# Altium PCB UKU100_001.PcbDoc (part 2 of 3)
Units mm, origin at the board's own origin, x right, y up, seen from the top; angles counter-clockwise.
Board outline 319.2 x 161.95 mm, 2 copper layers (Top Layer, Bottom Layer); 250 components, 337 nets, 871 pads, 490 vias.
Unrouted connection lines stored in the file: 3.
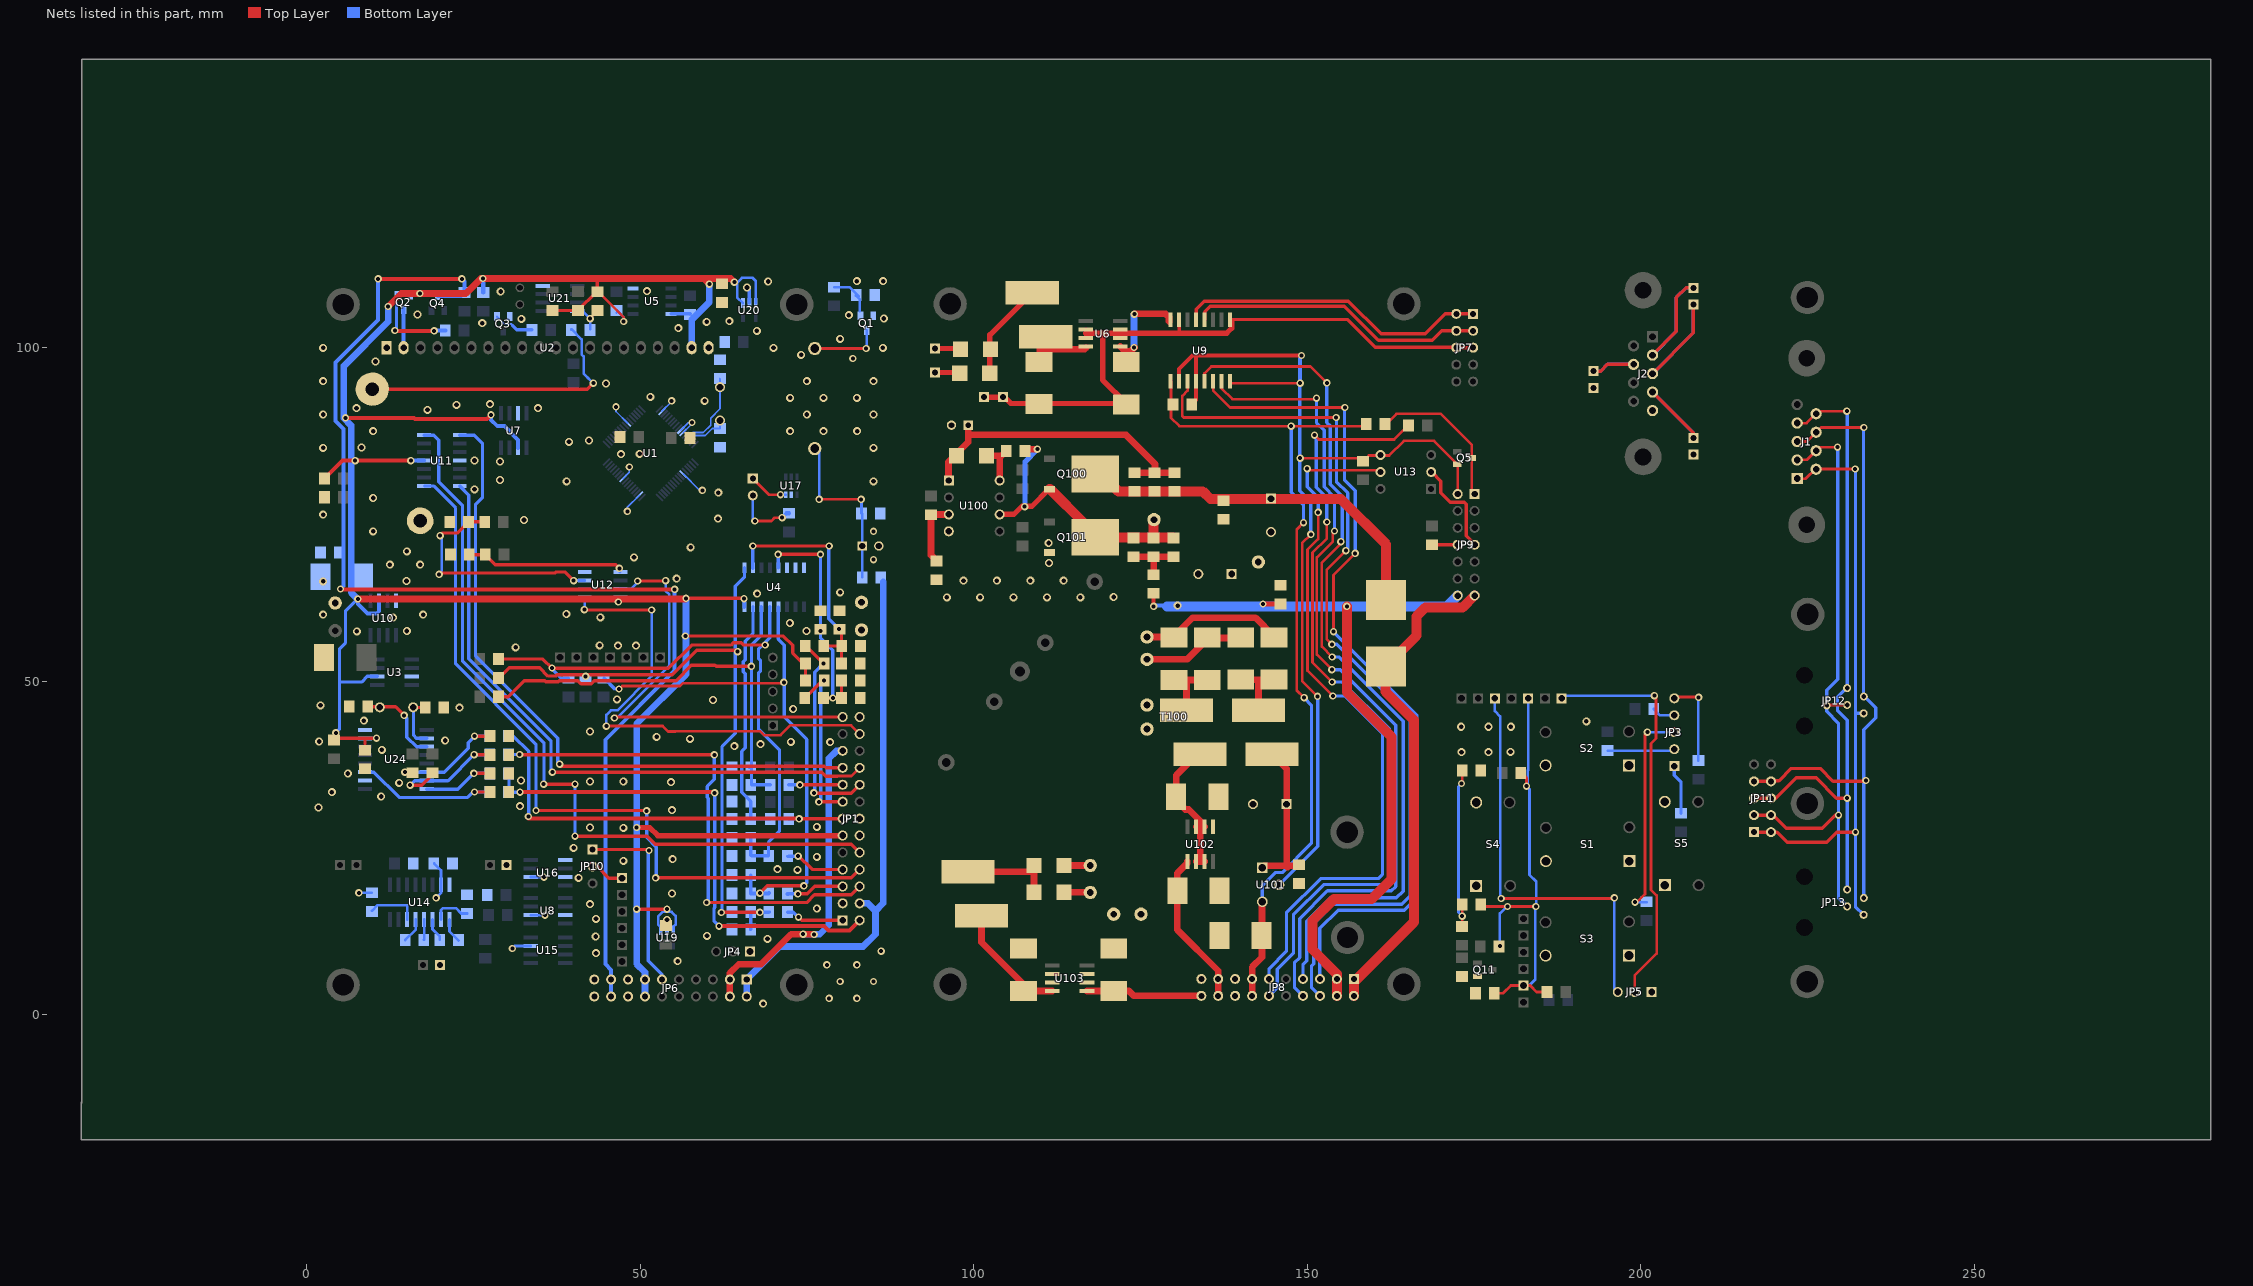
[diagram p2: the nets of this part, all layers, seen from the top]

## Via types
v1: diameter 1.1, hole 0.6, Top Layer to Bottom Layer, 338 vias
v2: diameter 1.2, hole 0.7, Top Layer to Bottom Layer, 152 vias

## Nets (pads, with @x,y where several pads share a name; then routed paths per layer and width w, separated by ;. In a path a pad name is that pad's centre, name@x,y a point inside that pad or via, vN(x,y) a via of type N, cw(c..) or ccw(c..) an arc to the next point about the centre after c; other vN are vias at no path point) (continued)
+5V: C15.2 C20.1 C54.2 D7.1 JP1.11 JP6.13 JP6.14 Q2.2 R22.2 R27.1 R63.2 R72.2 R73.1 R74.2 R75.2 R89.2 R97.2 U2.19 U3.6 U4.16 U5.8 U7.6 U10.2 U11.4 U12.8 U19.1 U19.3 U20.1 U20.3 U24.15 | length 430.8
  Top Layer w0.4: R75.2@40.7,105.6 R75.2@40.7,105.75 ; D7.1@43.35,108.4 43.75,108.4 47.55,104.6 v1(47.55,103.95)
  Top Layer w0.5: v1(4.4,42.3) 4.45,42.3 4.45,41.6 4.55,41.5 v1(10.5,41.5) ; C54.2@8.75,39.75 8.775,39.775 8.775,41.475 ; R74.2@36.9,105.6 R75.2@40.7,105.6 43.5,108.4 43.5,108.5 D7.1@43.55,108.55 ; D7.1@43.6,108.4 43.6,110.35 43.65,110.35 ; v1(49.5,15.85) v1(54.05,15.85) ; v1(56.8,56.8) 71.5,56.8 72.9,55.4 72.9,54.25 74.4,52.75 74.75,52.75 74.797,52.703 R63.2@74.797,50.097 ; v1(56.9,62.45) 65.55,62.45 v1(65.6,62.4)
  Top Layer w0.6: R27.1@2.703,80.403 5.4,83.1 v1@15.85,83.1 ; v1(5.85,89.5) 16.1,89.5 16.25,89.35 27.05,89.35 v1(27.65,89.95)
  Top Layer w0.8: v1(49.5,28.1) 51.45,28.1 52.665,26.885 JP1.11@80.38,26.885
  Top Layer w1: v1(7.7,62.35) 7.75,62.3 7.8,62.35 56.8,62.35 v1(56.9,62.45) ; v1(12.25,106.2) 14.2,108.15 23.9,108.15 26.15,110.4 56.65,110.4 ; 56.7,110.4 59.55,110.4 v1(60.4,109.55) ; 58.2,110.4 63.6,110.4 v1(64.15,109.85)
  Bottom Layer w0.3: R72.2@46.45,105.25 R72.2@46.5,105.3
  Bottom Layer w0.4: R72.2@46.6,105.55 47.55,104.6 v1(47.55,103.95) ; U19.1@53.1,12.65 53.1,13.15 52.75,13.5 52.75,14.8 53.4,15.45 54.75,15.45 55.35,14.85 55.35,13.55 55.05,13.25 U19.3@55.05,12.7 ; U19.1@53.1,12.675 U19.1@53.1,12.85 ; v1@54.05,15.45 v1(54.05,15.85) ; U20.1@65.412,106.688 64.6,107.5 64.6,109.8 65.3,110.5 66.9,110.5 67.35,110.05 U20.3@67.35,106.725
  Bottom Layer w0.5: v1(4.4,42.3) 4.95,42.85 4.95,54.85 5.85,55.75 5.85,60.55 7.675,62.375 v1@7.7,62.4 ; 4.95,49.9 8.25,49.9 9.115,50.765 U3.6@10.6,50.765 ; U24.15@8.775,41.475 v1@10.525,41.475 ; v1(10.5,41.5) v1@10.6,41.4 ; v1(46.75,61.9) 46.8,61.9 47.075,62.175 U12.8@47.075,62.595 ; U5.8@54.65,105.095 57.455,105.095 57.5,105.05 R73.1@57.55,105.1 ; U4.16@65.6,61.1 65.65,61.1 65.65,62.35 v1(65.6,62.4)
  Bottom Layer w0.6: 6.6,83.05 7.25,83.05 v1(7.3,83.1) ; v1(7.7,62.35) 7.7,61.6 9.15,60.15 10.5,60.15 10.865,60.515 U10.2@10.865,62.1 ; Q2.2@15.552,107.902 15.799,108.15 v1(17,108.15) ; v1@15.85,83.1 U11.4@17.625,83.1 ; v1(26.45,110.4) 26.5,110.35 R89.2@26.5,108.3 ; v1(27.65,89.95) 27.65,89.2 28.6,88.25 29.65,88.25 31.735,86.165 U7.6@31.735,85 ; v1@64.15,109.65 v1(64.15,109.85)
  Bottom Layer w1: v1(7.7,62.35) 7.675,62.375 6.7,63.35 6.7,88.35 5.6,89.45 5.6,97.3 12.25,103.95 v1(12.25,106.2) ; JP6.14@50.76,2.76 50.76,6.39 49.5,7.65 49.5,43.65 56.9,51.05 v1(56.9,62.45) ; U2.19@57.743,100.031 57.743,104.193 60.4,106.85 v1(60.4,109.55)
  other v1: 15.65,83.1
+5V_IZ: C27.2 C28.1 JP6.19 R47.1 R48.2 U14.16
+IAKB: 
+UOUT: JP1.4 JP6.1 JP6.2 R56.2 | length 80.8
  Bottom Layer w1: JP6.1@65.95,5.3 65.975,5.325 70.9,10.25 83.45,10.25 85.3,12.1 85.3,15.6 ; JP6.2@66,2.76 JP6.1@66,5.3 ; JP1.4@82.92,16.725 84.175,16.725 85.3,15.6 ; R56.2@86.45,64.9 86.45,16.75 85.3,15.6
-5V: C16.2 JP6.17 JP6.18 Q4.3 R90.1 | length 185.1
  Top Layer w0.6: v1(5.1,63.85) 5.15,63.8 7.5,63.8 v1(55.2,63.8) ; v1(10.75,110.35) v1(23.3,110.35)
  Bottom Layer w0.6: v1(5.1,63.85) 5.55,64.3 5.55,87.8 4.35,89 4.35,97.8 5.95,99.4 ; 5.75,99.2 10.75,104.2 v1(10.75,110.35) ; Q4.3@19.7,107.8 23.2,107.8 R90.1@23.7,108.3 23.7,109.95 v1(23.3,110.35) ; JP6.18@45.68,2.76 JP6.17@45.68,5.3 45.68,6.77 44.8,7.65 44.8,41.25 55.2,51.65 v1(55.2,63.8) ; v1(10.75,110.35) 10.7,110.4 v1(10.75,110.35)
-5V_IZ: C28.2 C30.2 JP6.20 U8.2 U14.15 U15.7 U16.2 X12.1 X14.1 | length 14.9
  Bottom Layer w0.4: v1(7.85,18.3) C30.2@9.8,18.3 ; C28.2@19.15,22.7 20.175,21.675 20.175,18.275 v1(19.45,17.55) ; v1(30.85,9.95) 31.235,10.335 U15.7@33.6,10.335 ; U8.2@33.6,14.965 35.735,14.965 v1(35.75,14.95) ; U16.2@33.6,20.665 35.585,20.665 v1(35.6,20.65)
-IAKB: 
-UOUT: JP1.21 JP6.3 JP6.4 | length 50.6
  Top Layer w0.8: JP1.21@80.38,39.585 JP1.21@80.38,39.6
  Top Layer w1: JP6.4@63.46,2.76 63.46,6.26 64.8,7.6 68.15,7.6 72.65,12.1 v1(74.45,12.1) ; v1@74.5,12.1 76.05,12.1 v1(76.1,12.05)
  Bottom Layer w1: v1(74.45,12.1) 76.95,12.1 78.3,13.45 78.3,38.45 79.435,39.585 JP1.21@80.38,39.585 ; v1@76.05,12.1 v1(76.1,12.05)
AD0: C11.2 R11.1 R32.1 U24.7 | length 20.4
  Top Layer w0.5: v1(15.55,34.45) 17.3,34.45 18.897,36.047 R32.1@18.897,36.303 ; v1(25.15,39.007) 27.493,39.007 C11.2@27.5,39
  Bottom Layer w0.5: v1(15.55,34.45) 16.225,35.125 21.225,35.125 25.107,39.007 R11.1@27.488,39.007
AD1: C24.2 R19.1 R44.1 U24.6 | length 19
  Top Layer w0.5: v1(14.75,36.4) 14.847,36.303 R44.1@15.897,36.303 ; v1(25.2,41.8) C24.2@27.45,41.8
  Bottom Layer w0.5: v1(14.75,36.4) 14.7,36.4 14.705,36.395 20.645,36.395 24.25,40 24.25,40.8 25.257,41.807 R19.1@27.488,41.807
AIN1: JP1.7 R21.2 | length 9
  Top Layer w0.5: v1(73.7,23.8) 73.8,23.8 75.795,21.805 JP1.7@80.38,21.805
  Bottom Layer w0.4: R21.2@72.1,23.8 72.142,23.758 R21.2@72.15,23.75
  Bottom Layer w0.5: R21.2@72.3,23.8 v1(73.7,23.8)
AIN1U: C9.1 R20.1 R21.1 R29.1 R33.1 U4.13 | length 90.7
  Top Layer w0.5: R29.1@28.797,53.346 35.454,53.346 36.85,51.95 54.25,51.95 57.75,55.45 63.65,55.45 64,55.8 65.2,55.8 65.55,55.45 v1(68.75,55.45)
  Bottom Layer w0.5: v1@36.85,51.85 36.85,51.8 38.203,50.447 R33.1@39.253,50.447 ; R20.1@66.6,26.45 66.6,23.95 66.7,23.85 69.25,23.85 69.25,25.85 70.9,27.5 70.9,39.75 67.75,42.9 67.75,51.2 68.05,51.5 68.05,53.15 67.75,53.45 67.75,54.8 68.575,55.625 69.465,56.515 U4.13@69.465,61.175
  other v1: 36.8,52
AIN2: JP1.13 R17.2 R19.2 | length 63
  Top Layer w0.5: v1@73.775,29.425 JP1.13@80.38,29.425
  Top Layer w0.6: v1@33.3,29.45 33.325,29.425 v1@73.8,29.425 ; v1@73.75,29.4 v1@73.775,29.425
  Bottom Layer w0.4: R17.2@72.1,29.4 R17.2@72.4,29.4
  Bottom Layer w0.5: R19.2@30.2,41.8 31,41.8 33.3,39.5 v1@33.3,29.45 ; R17.2@72.35,29.4 v1@73.75,29.4
  other v1: 73.85,29.4 33.25,29.75
AIN2U: C6.1 R16.1 R17.1 U4.15 | length 36.2
  Bottom Layer w0.5: U4.15@66.925,61.175 66.925,57.175 65.8,56.05 65.8,53.25 65.5,52.95 65.5,51.45 65.8,51.15 65.8,40.05 65.25,39.5 65.25,33.35 C6.1@66.6,32 R16.1@66.6,29.4 R17.1@69.5,29.4
AIN3: JP1.1 R7.2 | length 8.8
  Top Layer w0.5: v1(73.75,14.65) 74.215,14.185 JP1.1@80.38,14.185
  Bottom Layer w0.5: R7.2@72.1,15.4 73,15.4 v1(73.75,14.65)
AIN3U: C1.1 R6.1 R7.1 R30.1 R37.1 U4.1 | length 109.2
  Top Layer w0.5: R30.1@28.85,50.5 30.4,52.05 34.95,52.05 36.2,50.8 37.35,50.8 37.55,51 54.85,51 58.5,54.65 64.45,54.65 v1(64.65,54.45) ; v1@41.85,50.6 v1(41.85,50.75) ; v1@62.3,15.35 62.325,15.375 v1(67.95,15.375)
  Bottom Layer w0.4: R6.1@66.2,15.35 R6.1@66.55,15.35 ; C1.1@66.55,12.75 R6.1@66.55,15.35 ; R7.1@69.25,15.4 69.275,15.375 R7.1@69.3,15.35 ; R7.1@69.45,15.4 69.45,15.45 69.4,15.4 R6.1@66.6,15.4 R6.1@66.55,15.35
  Bottom Layer w0.5: v1(41.85,50.75) 41.853,50.747 R37.1@41.853,50.447 ; v1@62.3,15.35 62.3,40.25 64.3,42.25 64.3,63.4 64.3,64.25 65.655,65.605 U4.1@65.655,67.025 ; C1.1@66.6,12.8 R6.1@66.6,15.4 66.625,15.375 R7.1@69.275,15.375 ; v1@67.9,15.4 67.925,15.375 v1(67.95,15.375)
  other v1: 62.2,15.35
AIN4: JP1.17 R9.2 | length 8.1
  Top Layer w0.5: v1(73.95,34.5) 80.375,34.5 JP1.17@80.38,34.505
  Bottom Layer w0.5: R9.2@72.3,34.5 v1(73.95,34.5)
AIN4U: C2.1 R8.1 R9.1 R31.1 U4.14 | length 70.6
  Top Layer w0.5: R31.1@28.797,47.697 30.247,47.697 32.65,50.1 35.739,50.1 35.889,49.95 37.761,49.95 37.911,50.1 40.7,50.1 41.15,49.65 42.7,49.65 43.15,50.1 55.4,50.1 57.7,52.4 61.25,52.4 61.4,52.25 v1(66.7,52.25)
  Bottom Layer w0.4: C2.1@66.4,37.05 C2.1@66.55,37.05
  Bottom Layer w0.5: U4.14@68.195,61.175 68.195,56.945 66.7,55.45 66.7,37.2 66.7,34.55 66.75,34.5 R9.1@69.5,34.5
AIN5: JP1.5 R13.2 | length 8.8
  Top Layer w0.5: v1@73.6,18.15 75.05,18.15 76.165,19.265 JP1.5@80.38,19.265
  Bottom Layer w0.5: R13.2@72.15,18.2 72.15,18.15 v1(73.65,18.15)
  Bottom Layer w0.6: R13.2@72.1,18.15 R13.2@72.15,18.15
AIN5U: C3.1 R12.1 R13.1 R39.1 U4.12 | length 84.4
  Top Layer w0.4: v1@46.9,48.85 47.35,49.3 56,49.3 56.4,49.7 v1@71.4,49.7
  Top Layer w0.5: v1(46.85,48.85) v1@46.9,48.85 ; v1(67.95,18.25) 69.05,19.35 v1(74.55,19.35) ; v1@71.4,49.7 v1(71.55,49.85)
  Bottom Layer w0.5: R39.1@44.65,50.5 44.65,50.45 46.25,48.85 v1(46.85,48.85) ; C3.1@66.6,18.2 R12.1@66.6,20.95 ; U4.12@70.7,61.1 70.7,56.35 71.6,55.45 71.6,44.7 75,41.3 75,19.8 v1(74.55,19.35) ; v1(71.55,49.85) v1@71.6,49.8
  Bottom Layer w0.6: C3.1@66.6,18.2 69.25,18.2 R13.1@69.3,18.25 ; v1@67.95,18.2 v1(67.95,18.25)
AVAR: 
C0: 
DT1: JP1.15 R63.1 R64.1 | length 26
  Top Layer w0.5: R64.1@74.75,47.55 74.8,47.55 77.35,50.1 v1(77.6,50.1) ; v1(76.8,31.95) 76.815,31.965 JP1.15@80.38,31.965
  Bottom Layer w0.5: v1(76.8,31.95) 77.1,32.25 77.1,49.6 v1(77.6,50.1)
DT1U: C10.1 D9.2 R64.2 R65.2 U4.5 | length 36.2
  Top Layer w0.5: v1(70.7,69.05) v1(77.05,69.05) ; R64.2@77.503,47.503 80.147,47.503 80.15,47.5 80.2,47.55 R65.2@80.2,50.05
  Bottom Layer w0.5: U4.5@70.7,67 v1(70.7,69.05) ; v1(77.05,57.55) 77.088,57.588 v1@77.088,57.805 ; v1(77.05,69.05) 77.05,56.55 78.9,54.7 v1(78.9,47.503)
DT2: JP1.18 R22.1 R38.1 | length 31.3
  Top Layer w0.5: R38.1@74.8,55.4 v1(77.5,52.7) ; v1@76.1,33.3 76.15,33.25 81.675,33.25 JP1.18@82.925,34.5
  Bottom Layer w0.5: v1@76.1,33.3 76,33.3 76.2,33.5 76.2,51.4 v1(77.5,52.7)
  other v1: 76.05,33.3
DT2U: C7.1 D8.2 R38.2 R42.2 U4.2 | length 35.9
  Top Layer w0.5: v1(66.9,70.3) v1(78.35,70.3) ; R38.2@77.553,55.303 C7.1@80.253,55.303 C7.1@80.2,55.25 ; v1(79.85,57.85) 80.2,57.5 D8.2@80.2,52.75
  Bottom Layer w0.5: U4.2@66.9,66.95 v1(66.9,70.3) ; v1(78.35,70.3) 78.3,70.25 78.3,59.4 v1(79.85,57.85)
GND: BT1.2 C1.2 C2.2 C3.2 C4.1 C6.2 C7.2 C8.1 C9.2 C10.2 C11.1 C14.1 C15.1 C16.1 C17.1 C18.1 C19.2 C20.2 C21.1 C22.2 C23.1 C24.1 C31.1 C32.1 C33.1 C50.1 C53.1 C54.1 D8.1 D9.1 JP1.3 JP1.12 JP1.26 JP4.1 JP6.15 JP6.16 pad.4@4.3,61.75 pad.9@83.2,57.7 pad.9@83.2,61.85 Q1.2 Q3.2 R6.2 R8.2 R12.2 R16.2 R20.2 R28.1 R36.1 R42.1 R57.1 R65.1 U1.6 U1.18 U1.25 U1.42 U1.50 U1.58 U1.59 U2.1 U2.20 U3.3 U4.6 U4.7 U4.8 U5.4 U7.3 U8.7 U10.4 U11.11 U12.4 U16.5 U16.7 U17.2 U19.2 U20.2 U21.4 U24.10 U24.16 | length 22.4
  Bottom Layer w0.25: v1(46.4,91.15) 46.4,90.461 U1.42@48.153,88.708 ; U1.25@47.446,80.399 48.4,81.354 v1(48.4,82.15) ; v1(48.1,75.5) 48.1,76.104 U1.18@49.921,77.924 ; U1.50@53.279,90.476 54.75,91.946 v1(54.75,92.05) ; U1.58@56.108,87.647 57.211,88.75 v1@57.5,88.75 ; U1.6@56.461,81.106 58.918,78.65 v1(59.35,78.65) ; U1.59@56.5,87.3 57.55,88.35 v1@57.55,88.7 ; v1@57.5,88.7 v1@57.65,88.55
  Bottom Layer w0.4: U19.2@54.05,12.675 v2@54.05,14.1
  Bottom Layer w0.5: v2(66.05,109.05) 66.4,108.7 U20.2@66.4,106.725
  other v1: 78.35,2.5 82.5,2.5 80,5 85,5 78,7.5 82.5,7.5 86.15,9.55 85,68.25 85,72.5 57.8,88.8 81.9,98.4
  other v2: 68.45,1.7 55.65,8.05 43.4,9.25 69.1,11.4 43.35,11.75 60.05,11.85 54.05,14.25 43.4,14.4 76.5,15.95 42.5,16.6 54.8,18.2 40.8,20.55 73.6,21.75 70.6,21.85 47.5,23.1 54.9,23.35 76.5,23.7 40.05,25.05 47.5,28.05 42.5,28.1 76.5,28.2 54.8,30.7 1.8,31.1 32,31.3 11.2,32.75 3.8,33.4 13.9,34.8 54.65,34.9 42.5,35 47.5,35 32.15,35.15 6.2,36.2 11.3,39.75 64.15,40.3 68.05,40.6 78.5,40.9 72.6,40.95 1.9,41 20.8,41.15 57.5,41.4 52.5,41.7 42.5,42.5 8.6,44.1 72.95,45.85 22.95,46.05 2.1,46.4 60.95,47.2 46.55,47.3 31.35,55.1 46.7,55.35 49.4,55.35 43.95,55.4 7.55,57.5 15.05,57.55 74.95,57.55 72.45,58.75 13,59.55 44.05,59.6 2.5,60 17.5,60 38.95,60.1 67.55,63.15 80,63.35 2.5,65 15,65.05 55.5,65.4 12.5,67.5 17.05,67.5 49.1,68.6 15.05,69.5 57.6,70.1 10,72.5 32.6,74.2 61.7,74.4 2.5,75 10,77.5 61.75,78.3 25.2,78.8 39,80 85,80 29,80.2 29,82.95 25.2,83.1 47.15,84.05 49.95,84.1 2.5,85 85,85 8.25,85.05 39.35,85.9 42.35,86.1 10,87.5 72.5,87.5 77.5,87.5 82.55,87.5 2.5,90 75,90 85,90 18.15,90.7 7.5,90.95 34.7,90.95 22.5,91.45 27.5,91.55 59.7,92.05 72.5,92.5 77.5,92.5 82.5,92.5 51.55,92.65 44.9,94.65 2.5,95 75,95 85,95 10.35,97.95 74.15,98.95 2.5,100 70,100 86.4,100 80,101.35 67.5,102.55 55.75,102.95 26.35,103.7 60,103.9 63.4,104 32.2,104.35 86.55,104.4 81.3,104.9 16.65,105 29.1,108.45 51.05,108.5 69.2,109.95 82.5,110 86.45,110
I1: 
I1+: JP1.6 R11.2 | length 77.5
  Top Layer w0.5: v1(31.95,39.05) 32,39 v1(61.15,39) ; v1(60,16.85) 75,16.85 76.15,18 81.655,18 JP1.6@82.92,19.265
  Bottom Layer w0.5: R11.2@30.3,39.05 v1(31.95,39.05) ; v1(60,16.85) 60.25,17.1 60.25,32.45 60.1,32.6 60.1,34.25 61.15,35.3 v1(61.15,39)
I1-: JP1.2 R15.2 R18.2 | length 76.1
  Top Layer w0.6: v1(32,33.4) 61.1,33.4 v1(61.2,33.3) ; v1(61.85,13.3) 77.6,13.3 78.25,12.65 81.385,12.65 JP1.2@82.92,14.185
  Bottom Layer w0.5: R15.2@30.288,36.207 30.35,36.144 30.35,33.4 v1(32,33.4) ; v1(61.2,33.3) 61.2,16.1 61.1,16 61.1,14.05 v1(61.85,13.3)
LO1: JP1.8 U11.1 | length 114.8
  Top Layer w0.5: v1(34.4,30.65) 50.95,30.65 v1(51,30.6) ; v1(52.35,20.55) 81.665,20.55 JP1.8@82.92,21.805
  Bottom Layer w0.5: U11.1@17.7,79.3 19.05,79.3 22.35,76 22.35,52.65 34.4,40.6 v1(34.4,30.65) ; v1(51,30.6) 51,26.6 52.45,25.15 52.45,20.65 v1(52.35,20.55)
LO2: JP1.10 U11.7 | length 116.8
  Top Layer w0.5: v1(35.55,34.6) v1(40.25,34.6) ; v1(40.25,26.8) 51.05,26.8 52.25,25.6 81.665,25.6 JP1.10@82.92,24.345
  Bottom Layer w0.5: U11.7@17.625,86.91 19.09,86.91 19.85,86.15 19.85,79.9 23.4,76.35 23.4,53 35.6,40.8 v1@35.6,34.6 ; v1(40.25,26.8) v1(40.25,34.6)
LO3: JP1.19 U11.8 | length 100.3
  Top Layer w0.5: v1(37.95,37.6) 38.25,37.3 77.65,37.3 77.905,37.045 JP1.19@80.38,37.045
  Bottom Layer w0.5: U11.8@22.975,86.91 25.14,86.91 26.4,85.65 26.4,77.6 25.35,76.55 25.35,53.8 37.65,41.5 37.65,37.9 v1(37.95,37.6)
LO4: JP1.20 U11.14 | length 95.4
  Top Layer w0.45: 79.55,35.8 81.7,35.8 JP1.20@82.9,37
  Top Layer w0.5: v1(36.85,36.4) 77.25,36.4 77.85,35.8 79.55,35.8
  Bottom Layer w0.5: U11.14@22.975,79.29 24.35,77.915 24.35,53.4 36.65,41.1 36.65,36.6 v1(36.85,36.4)
LO5: JP1.24 U12.1 | length 72.5
  Top Layer w0.4: v1(41.65,60.75) 41.7,60.7 v1(51.75,60.7) ; v1(44.95,43.3) 53.4,43.3 54.2,42.5 55.3,42.5 55.35,42.55 68,42.55 68.6,41.95 71.05,41.95 72.5,43.4 81.645,43.4 JP1.24@82.92,42.125
  Bottom Layer w0.4: v1(41.65,60.75) 41.7,60.8 U12.1@41.7,62.6 ; v1(44.95,43.3) 44.95,44.95 45.65,45.65 46.6,45.65 51.75,50.8 v1(51.75,60.7)
LO6: JP1.25 U12.7 | length 66.3
  Top Layer w0.4: v1(46.15,44.5) 46.45,44.8 46.6,44.65 80.3,44.65 JP1.25@80.35,44.7 ; v1@49.85,65.05 53.9,65.05 v1(53.85,65.1)
  Bottom Layer w0.4: v1(46.15,44.5) 46.55,44.5 54.4,52.35 54.4,63 53.85,63.55 v1(53.85,65.1) ; U12.7@47.075,63.865 48.665,63.865 v1@49.85,65.05
  other v1: 49.65,65.05
NetA1_1: A1.1 Q1.3 | length 10.5
  Top Layer w0.5: A1.1@76.2,99.9 v1(83.9,99.9)
  Bottom Layer w0.4: v1(83.9,99.9) 84,100 Q1.3@84,102.65
NetA1_2: A1.2 C19.1 R56.1 R57.2 | length 25.1
  Top Layer w0.4: v1(76.85,77.3) v1(83.15,77.3)
  Bottom Layer w0.4: v1(76.85,77.3) A1.2@76.85,84.3 ; v1(83.15,77.3) 83.2,77.25 R57.2@83.2,75.2 ; R57.2@83.25,75.2 R57.2@83.2,75.2 ; R56.1@83.3,65.6 83.3,70.35 83.3,75.1 83.225,75.175 R57.2@83.2,75.2
NetBT1_1: BT1.1 D6.1 | length 43
  Top Layer w0.5: BT1.1@9.854,93.816 42.066,93.816 v1@42.95,94.7
  Bottom Layer w0.4: D6.1@39.7,102.8 41.25,101.25 41.25,99 41.55,98.7 41.55,96.15 42.2,95.5 42.2,95.45 v1@43,94.65 ; D6.1@39.705,102.691 D6.1@39.709,102.691
  other v1: 43,94.7
NetC4_2: C4.2 R18.1 U24.11 | length 22.9
  Top Layer w0.5: v1(25.2,33.407) C4.2@27.512,33.407
  Bottom Layer w0.5: U24.11@8.775,36.395 10.105,36.395 13.9,32.6 24.15,32.6 24.957,33.407 R18.1@27.488,33.407
NetC5_1: C5.1 C102.1 JP8.13 JP8.14 R23.1 U9.1 U101.3 | length 127.4
  Top Layer w0.4: U9.1@129.6,95 129.6,89.5 130.85,88.25 158.7,88.25 R23.1@159,88.55 ; v1(149.45,73.8) 148.45,72.8 148.45,48.65 v1(149.55,47.55)
  Top Layer w1: JP8.14@141.76,2.86 141.76,5.31 141.76,7.16 143.25,8.65 143.25,16.85 U101.3@143.4,17
  Bottom Layer w0.5: U101.3@143.3,16.96 143.3,19.4 145.25,21.35 146.25,21.35 150.65,25.75 150.65,46.45 v1(149.55,47.55) ; v1(147.6,88.25) 147.6,78.35 149.45,76.5 v1(149.45,73.8)
NetC5_2: C5.2 C101.2 C102.2 C104.1 C105.1 C109.1 JP8.15 JP8.16 JP9.2 Q5.2 R26.1 T100.4 T100.5 U9.2 U9.4 U9.8 U13.4 U101.2 U102.5 | length 154.3
  Top Layer w0.4: U9.8@138.45,94.85 138.6,94.7 v1(148.95,94.7) ; v1(148.95,83.45) 157.85,83.45 158.35,82.95 159.25,83.85 162.3,83.85 164.5,86.05 169.05,86.05 172.5,82.6 172.57,82.53 JP9.2@172.57,78.1 ; v1(150.55,72.05) 149.25,70.75 149.25,50.05 v1(151.55,47.75)
  Top Layer w0.6: U9.2@130.825,94.975 130.825,96.825 132.85,98.85 v1(149.15,98.85) ; C5.2@132.7,91.5 133.35,92.15 133.35,98.65 133.55,98.85
  Bottom Layer w0.5: U101.2@145.8,19.5 151.6,25.3 151.6,47.7 v1(151.55,47.75) ; v1(148.95,94.7) 148.9,94.65 148.9,78.55 150.55,76.9 v1(150.55,72.05)
  Bottom Layer w0.6: v1(148.95,94.7) 148.95,98.65 v1(149.15,98.85)
NetC8_2: C8.2 R45.2 U12.3 | length 36.1
  Top Layer w0.5: v1(19.9,66.05) 20.1,66.25 37.3,66.25 37.45,66.4 38.75,66.4 v1(40.05,65.1) ; v1(20.05,71.85) 20.45,72.25 22.7,72.25 24.35,73.9 24.357,73.907 R45.2@26.712,73.907
  Bottom Layer w0.4: v1(19.9,66.05) 20.3,66.45 20.3,71.6 v1(20.05,71.85) ; v1(40.05,65.1) 40.085,65.135 U12.3@41.725,65.135
NetC12_1: C12.1 L1.2 U6.8 | length 11.1
  Top Layer w1: C12.1@109.95,97.85 109.95,100.8 110.807,101.657 L1.2@110.807,101.668 ; 110.05,99.8 116.65,99.8 U6.8@116.85,100
NetC12_2: C12.2 C13.2 JP7.5 JP7.6 U6.2 U6.3 U6.6 U6.7 U9.9 U9.15 X2.1 X16.1 | length 100.2
  Top Layer w0.5: U6.7@116.8,101.465 U6.6@116.8,102.735 ; 116.8,102.2 116.9,102.1 ; U6.6@116.8,102.75 U6.6@116.85,102.8 ; U6.2@122,101.465 U6.3@122,102.7 ; 130.825,102.2 U9.15@130.825,104.225 ; U9.9@138.445,104.1 U9.9@138.445,104.225 ; U9.9@138.45,104.25 156.05,104.25 160.2,100.1 172.35,100.1 172.43,100.02 JP7.5@174.9,100.02
  Top Layer w0.8: X2.1@101.6,92.6 104.65,92.6 105.6,91.65 C13.2@122.9,91.65 ; 116.8,102.2 137.95,102.2 138.7,102.95 U9.9@138.7,104.1 ; 119.35,102.2 119.35,95.2 C13.2@122.9,91.65 ; C13.2@122.95,91.7 C13.2@122.9,91.65
NetC13_1: C13.1 U6.1 U9.16 | length 15.7
  Top Layer w1: U6.1@122,100.195 122.8,99.395 C13.1@122.8,97.7 ; 122.756,99.439 123.539,99.439 124.15,100.05 v1(124.05,100.05) ; v1(124.1,105.05) 124.15,105.1 128.8,105.1 129.3,104.6 129.3,104 U9.16@129.35,103.95
  Bottom Layer w1: v1(124.05,100.05) 124.05,105 v1(124.1,105.05)
NetC18_2: C18.2 R49.2 U12.5 | length 23.9
  Top Layer w0.5: C18.2@24.388,68.993 26.793,68.993 26.796,68.99 28.287,67.5 46.35,67.5 v1(46.9,66.95)
  Bottom Layer w0.5: v1(46.9,66.95) 46.95,66.9 46.95,66.5 U12.5@47,66.45
NetC21_2: C21.2 U1.61 Y1.1 | length 11.7
  Bottom Layer w0.25: U1.61@57.168,86.586 57.882,87.3 59.5,87.3 60.6,88.4 60.6,89.45 62,90.85 C21.2@62,95.35
NetC23_2: C23.2 R15.1 U24.8 | length 12.9
  Top Layer w0.5: v1(25.1,36.207) 25.143,36.25 C23.2@27.5,36.25
  Bottom Layer w0.5: U24.8@18.025,33.855 22.705,33.855 25.057,36.207 R15.1@27.488,36.207 ; v1@25.1,36.15 v1(25.1,36.207)
NetC26_1: C26.1 U14.3 | length 3.5
  Bottom Layer w0.4: U14.3@18.905,14.3 18.905,12.845 20,11.75 C26.1@20,11.25
NetC26_2: C26.2 U14.1 | length 3.7
  Bottom Layer w0.4: U14.1@21.445,14.3 21.445,12.505 C26.2@22.8,11.15
NetC27_1: C27.1 U14.2 | length 5.8
  Bottom Layer w0.4: U14.2@20.175,14.3 20.175,15.725 20.45,16 22.4,16 23.2,15.2 C27.1@24.1,15.2
NetC29_1: C29.1 U14.4 | length 3.1
  Bottom Layer w0.4: C29.1@17.6,11.25 17.635,11.285 U14.4@17.635,14.3
NetC29_2: C29.2 U14.5 | length 3.7
  Bottom Layer w0.4: C29.2@14.8,11.2 16.365,12.765 U14.5@16.365,14.3
NetC30_1: C30.1 U14.6 | length 7.8
  Bottom Layer w0.4: C30.1@9.8,15.6 10.65,16.45 15.09,16.45 15.095,16.445 U14.6@15.095,14.3
NetC31_2: C31.2 U1.62 Y1.2 | length 6.4
  Bottom Layer w0.25: U1.62@57.522,86.233 58.139,86.85 59.8,86.85 60.85,87.9 C31.2@61.95,87.9 ; C31.2@62,87.9 Y1.2@62,89.15
NetC34_1: C34.1 D2.1 JP5.1 Q11.2 R79.1 S1.1 S2.1 S3.1 S4.1 S5.1
  other v2: 173.15,39.4 177.201,39.4 180.501,39.45 173.101,43.2 177.2,43.2 180.55,43.2 191.85,44
NetC34_2: C34.2 C36.2 R46.2 R81.1 R82.1 X39.1 X40.1 | length 71.3
  Top Layer w0.4: C36.2@176,16.55 176.3,16.25 v1(184.3,16.25) ; C34.2@178.05,3.25 179.4,3.25 180.55,4.4 183.45,4.4 184.4,3.45 R81.1@185.9,3.45
  Top Layer w0.5: R46.2@178.779,10.294 178.844,10.294 v1(178.9,10.35) ; v1@180,16.25 v1(180.05,16.25) ; R82.1@182.05,36.3 182.9,35.45 v1(182.9,34.3)
  Bottom Layer w0.4: v1(178.9,10.35) 178.9,15.2 180.05,16.35 v1(180.05,16.25) ; X40.1@182.45,4.4 183.3,4.4 184.2,5.3 184.2,16.15 184.35,16.3 184.35,19.99 183.35,20.99 183.35,33.85 v1(182.9,34.3) ; v1@183.05,34.2 183.1,34.25 183.1,36.7 183.15,36.75 X39.1@183.15,47.45
NetC36_1: C36.1 D2.2 R80.2 | length 25.7
  Top Layer w0.4: v1(173.15,34.7) 173.25,34.8 D2.2@173.25,36.65 ; C36.1@173.25,16.55 R80.2@173.25,13.25 R80.2@173.3,13.2
  Bottom Layer w0.4: v1(173.15,34.7) 172.7,34.25 172.7,15.35 v1(173.25,14.8)
NetC50_2: C50.2 U24.2 Y3.1 | length 8.1
  Top Layer w0.5: Y3.1@16,46.1 16.003,46.097 C50.2@17.797,46.097
  Bottom Layer w0.5: Y3.1@16.05,46.1 16.05,41.9 16.475,41.475 U24.2@18.025,41.475
NetC53_2: C53.2 U24.3 Y3.2 | length 13
  Top Layer w0.5: C53.2@9.203,46.203 13.347,46.203 v1(14.65,44.9)
  Bottom Layer w0.5: v1(14.65,44.9) 15.05,44.5 15.05,41.65 16.495,40.205 U24.3@18.025,40.205
NetC100_1: C100.1 D100.1 R100.2 R101.2 R102.2 U100.1 | length 46.6
  Top Layer w1: U100.1@96.25,80.15 96.25,82.9 99.189,85.839 C100.1@99.189,88.408 ; U100.1@96.29,80.11 U100.1@96.3,80.1 ; 99.189,86.95 122.85,86.95 127.2,82.6 R101.2@127.2,81.3 ; R100.2@124.149,81.3 R102.2@130.15,81.3
NetC100_2: C100.2 C106.2 C114.2 C117.2 JP8.3 JP8.4 JP9.14 Q101.3 R109.2 U100.4 | length 123.4
  Top Layer w0.6: v1(127,61.25) C117.2@127,63.2
  Top Layer w0.8: v1(143.4,61.6) R109.2@146,61.6
  Top Layer w1.5: JP8.4@154.46,2.87 154.46,5.49 154.45,5.5 154.45,6.15 150.8,9.8 150.8,14.15 154,17.35 159.65,17.35 162.65,20.35 162.65,41.7 155.95,48.4 v1@155.95,61.15 ; v1(155.95,61.25) 156,61.2 v1@156,61.15
  Bottom Layer w0.6: v1(127,61.25) 127.1,61.35 v2(130.6,61.35)
  Bottom Layer w1.5: 129,61.2 170.91,61.2 JP9.14@172.57,62.86 ; v1@156,61.2 v1@156,61.25
  other v2: 96,62.6 101,62.6 106,62.6 111,62.6 116,62.6 121,62.65 98.5,65.1 103.5,65.1 108.5,65.1 113.5,65.1 111.3,67.75 111.25,70.75
NetC101_1: C101.1 C109.2 L100.2 U101.1 | length 23.7
  Top Layer w1: U101.1@143.3,22.05 U101.1@143.3,22.04 143.61,22.35 C109.2@148.7,22.35 ; L100.2@144.746,39.078 146.95,36.874 146.95,22.25 147.05,22.15 147.25,22.35
NetC103_1: C103.1 FU100.2 Q100.4 R100.1 R101.1 R102.1 R103.1 | length 56.3
  Top Layer w1.5: Q100.4@118.225,81.1 119.1,81.1 121.7,78.5 134.35,78.5 135.5,77.35 144.65,77.35 155.05,77.35 161.85,70.55 FU100.2@161.85,62.25
NetC103_2: C103.2 C106.1 R103.2 R109.1 T100.1
NetC104_2: C104.2 L101.2 U102.2 U102.3 U102.6 U102.7 | length 21.7
  Top Layer w1: U102.2@133.365,23 U102.3@134.635,23 ; U102.7@133.365,28.2 U102.6@134.635,28.2 ; L101.2@133.5,39.05 130.4,35.95 130.4,32.75 C104.2@130.35,32.7 130.35,32.2 131.75,30.8 132.25,30.8 133.95,29.1 133.95,28.2 ; 134,23 134,28.25
NetC105_2: C105.2 JP8.17 JP8.18 U102.1 | length 23.3
  Top Layer w1: U102.1@132.05,23 132.05,22.75 130.55,21.25 C105.2@130.55,18.6 130.55,12.75 136.68,6.62 JP8.17@136.68,5.4 JP8.18@136.68,2.86
NetC107_1: C107.1 L102.2 U103.8 | length 17.6
  Top Layer w1: L102.2@101.25,14.9 101.196,14.846 101.196,10.904 108.505,3.595 U103.8@111.8,3.595
NetC107_2: C107.2 C108.2 JP8.19 T100.8 T100.9 U103.2 U103.3 U103.6 U103.7
NetC108_1: C108.1 JP8.20 U103.1 | length 17.4
  Top Layer w1: U103.1@117,3.595 123.305,3.595 124.04,2.86 JP8.20@134.14,2.86
NetC111_1: C111.1 D100.2 U100.8 | length 7
  Top Layer w1: D100.2@101.95,83.8 104.15,83.8 C111.1@104.9,84.55 ; 103.9,83.8 103.91,83.79 U100.8@103.91,80.11
NetC111_2: C111.2 Q100.3 Q101.4 R106.1 R107.1 R108.1 T100.2 U100.6 | length 41.3
  Top Layer w0.8: U100.6@103.91,75.03 106.03,75.03 107.25,76.25 108.75,76.25 Q100.3@111.25,78.75
  Top Layer w1: C111.2@108.15,84.8 v1(109.55,84.8)
  Top Layer w1.5: Q100.3@111.375,78.815 111.485,78.815 Q101.4@116.65,73.65 ; Q101.4@118.225,71.6 R108.1@129.9,71.6 ; R107.1@127,71.5 T100.2@127,74.15
  Bottom Layer w0.8: v1@107.7,76.25 107.7,82.9 v1@109.55,84.75
  other v1: 107.65,76.2
NetC114_1: C114.1 R105.1 U100.3 | length 10
  Top Layer w1: C114.1@94.4,68.05 94.35,68.1 94.35,68.2 93.63,68.92 93.63,75.03 U100.3@96.29,75.03
NetC117_1: C117.1 R106.2 R107.2 R108.2 | length 8.9
  Top Layer w1: R106.2@124,68.7 R108.2@130.15,68.7 ; R107.2@126.9,68.75 126.95,68.7 126.975,68.675 127,68.65 C117.1@127,66.05
NetD1_2: D1.2 JP14.2 | length 9.5
  Top Layer w0.4: v1(67.2,74.05) 69.7,74.05 70.2,74.55 v1(71.3,74.55)
  Bottom Layer w0.4: JP14.2@66.9,77.86 66.9,74.35 v1(67.2,74.05)
  Bottom Layer w0.6: v1(71.3,74.55) 71.955,75.205 D1.2@72.309,75.205
NetD3_1: D3.1 X1.1 | length 4
  Top Layer w0.8: X1.1@94.2,99.9 98.05,99.9 D3.1@98.15,99.8
NetD3_2: D3.2 D4.2 L1.1 | length 14.7
  Top Layer w0.8: D4.2@102.45,96.2 102.45,101.95 L1.1@108.75,108.25
NetD4_1: D4.1 X3.1 | length 3.8
  Top Layer w0.8: X3.1@94.2,96.3 97.9,96.3 97.975,96.225 D4.1@98,96.2
NetD6_2: D6.2 D7.2 U21.8 | length 5.6
  Top Layer w0.4: v1(42.519,104.369) 43.45,105.3 D7.2@43.45,105.6
  Bottom Layer w0.4: U21.8@40.6,105.495 41.405,105.495 42.525,104.375 v1@42.531,104.369 ; v1(42.519,104.369) v1@42.531,104.369 ; D6.2@42.55,102.8 42.55,104.35 v1@42.531,104.369
NetD101_1: D101.1 D102.2 T100.3 | length 15.4
  Top Layer w1: T100.3@126,53.3 132,53.3 135.2,56.5 D101.1@140.05,56.5
NetD101_2: D101.2 D103.2 L100.1 | length 9.5
  Top Layer w1: D101.2@140.1,50.3 140.15,50.25 D103.2@145.05,50.25 ; 142.65,50.2 142.65,50.15 142.714,50.086 L100.1@142.714,45.682
NetD102_1: D102.1 D104.1 L101.1 | length 9.7
  Top Layer w1: D104.1@130.15,50.25 130.05,50.25 130.1,50.2 D102.1@135.05,50.2 ; L101.1@131.914,45.682 131.914,50.164 D104.1@131.95,50.2
NetD103_1: D103.1 D104.2 T100.6 | length 21.8
  Top Layer w1: T100.6@126,56.65 129.95,56.65 132.85,59.55 142.25,59.55 144.95,56.85 D103.1@144.95,56.3
NetD105_1: D105.1 T100.7 | length 3.9
  Top Layer w1: D105.1@113.55,22.4 T100.7@117.45,22.4
NetD105_2: D105.2 D106.2 L102.1 | length 13.9
  Top Layer w0.6: D105.2@109.018,21.482 109.05,21.45 D105.2@109.05,21.5
  Top Layer w1: L102.1@99.164,21.482 D105.2@109.018,21.482 ; D106.2@109.05,18.4 D105.2@109.05,22.4
NetD106_1: D106.1 T100.10 | length 4
  Top Layer w0.6: T100.10@117.5,18.4 T100.10@117.55,18.35
  Top Layer w1: D106.1@113.55,18.4 T100.10@117.5,18.4
NetFU100_1: FU100.1 JP8.1 JP8.2 JP9.13 | length 74.2
  Top Layer w1.5: JP8.2@157,2.87 157,4.9 166,13.9 166,44.2 162.4,47.8 161.75,48.45 FU100.1@161.75,52.35 ; FU100.1@161.9,52.35 162.125,52.575 166.4,56.85 166.4,59.75 167.727,61.077 173.327,61.077 JP9.13@175.11,62.86
NetJ1_1: J1.1 J1.6 JP11.1 JP11.2 JP12.1 JP13.1 | length 94.4
  Top Layer w0.4: J1.1@223.45,80.4 224.75,80.4 226.2,81.85 v1(232.15,81.85)
  Top Layer w0.5: JP11.1@217,27.4 220.45,27.4 221.95,25.9 227.9,25.9 229.4,27.4 v1(232.2,27.4)
  Bottom Layer w0.5: v1(232.15,81.85) v1@232.2,81.8 ; 232.2,45.2 JP12.1@233.425,45.2 ; v1@232.2,81.85 232.2,16.225 JP13.1@233.425,15
NetJ1_2: J1.2 J1.7 JP11.3 JP11.4 JP12.2 JP13.2 | length 95.1
  Top Layer w0.4: J1.2@223.45,83.2 224.9,83.2 226.8,85.1 v1(229.5,85.1) ; v1(227.9,46.35) 228,46.45 JP12.2@231,46.45
  Top Layer w0.5: JP11.3@217,29.94 219.91,29.94 221.85,28 227.2,28 229.15,29.95 v1(229.65,29.95) v1@229.64,29.94
  Bottom Layer w0.5: v1(229.5,85.1) 229.55,85.05 229.55,50.3 227.9,48.65 227.9,45.5 229.65,43.75 229.65,17.565 JP13.2@230.95,16.265
NetJ1_3: J1.3 J1.8 JP11.7 JP11.8 JP12.3 JP13.3 | length 102.6
  Top Layer w0.4: J1.3@223.466,85.959 224.959,85.959 226.3,87.3 227.05,88.05 v1(233.45,88.05)
  Top Layer w0.5: JP11.7@217,35.02 JP11.8@219.54,35.02 ; JP11.8@219.5,35.1 220.75,35.1 222.6,36.95 226.9,36.95 228.83,35.02 233.62,35.02 v1(233.75,35.15)
  Bottom Layer w0.25: JP13.3@233.45,17.535 JP13.3@233.45,17.55
  Bottom Layer w0.5: JP13.3@233.4,17.55 233.45,17.6 233.45,42.75 235.25,44.55 ; 233.4,86.2 233.4,86.85 233.4,47.9 235.25,46.05 235.25,44.6 235.2,44.55 ; 233.4,86.25 233.4,88 v1(233.45,88.05)
NetJ1_4: J1.4 J1.9 JP11.5 JP11.6 JP12.4 JP13.4 | length 97.6
  Top Layer w0.4: J1.4@223.45,88.7 224.85,88.7 226.65,90.5 v1(230.9,90.5)
  Top Layer w0.5: JP11.5@217,32.48 220.23,32.48 223.3,35.55 226.3,35.55 229.35,32.5 v1(230.95,32.5) v1@230.93,32.48
  Bottom Layer w0.5: v1(230.9,90.5) 230.95,90.45 230.95,49.1 229.5,47.65 229.5,45.65 230.95,44.2 JP13.4@230.95,18.85
NetJ2_2: J2.2 X5.1 | length 26.6
  Top Layer w0.5: J2.2@201.75,98.9 205.35,102.5 205.35,107.55 206.8,109 X5.1@207.9,109
  Bottom Layer w0.5: J2.2@201.784,98.911 205.35,102.478 205.35,107.55 206.8,109 X5.1@207.9,109
NetJ2_3: J2.3 X9.1 | length 25.8
  Top Layer w0.5: J2.3@201.784,96.141 207.9,102.258 X9.1@207.9,106.5
  Bottom Layer w0.5: J2.3@201.784,96.141 207.9,102.258 X9.1@207.9,106.5
NetJ2_4: J2.4 X11.1 | length 18.8
  Top Layer w0.5: J2.4@201.784,93.371 207.9,87.255 X11.1@207.9,86.5
  Bottom Layer w0.5: J2.4@201.784,93.371 207.9,87.255 X11.1@207.9,86.5
NetJ2_5: J2.5 X13.1 X15.1
NetJ2_7: J2.7 X7.1 | length 12.9
  Top Layer w0.5: X7.1@192.9,96.5 194,96.5 195.026,97.526 J2.7@198.944,97.526
  Bottom Layer w0.5: X7.1@192.9,96.5 194,96.5 195.026,97.526 J2.7@198.944,97.526
NetJP1_14: JP1.14
NetJP3_1: JP3.1 R1.2 | length 7.5
  Bottom Layer w0.5: JP3.1@205.05,37.35 205.05,35.9 206.05,34.9 R1.2@206.05,30.25
NetJP3_2: JP3.2 R2.2 | length 10.1
  Bottom Layer w0.4: R2.2@195.05,39.6 204.81,39.6 JP3.2@205.05,39.84
NetJP3_3: JP3.3 R3.2 | length 32.3
  Top Layer w0.4: v1(199.15,16.9) 199.45,16.9 200.65,18.1 200.65,42.05 v1(201,42.4)
  Bottom Layer w0.4: v1(199.15,16.9) R3.2@200.9,16.9 ; v1(201,42.4) 205.03,42.4 JP3.3@205.05,42.38
NetJP3_4: JP3.4 R4.2 | length 3.5
  Bottom Layer w0.4: R4.2@201.95,45.85 202.88,44.92 JP3.4@205.05,44.92
NetJP3_5: JP3.5 R5.2 | length 13.2
  Top Layer w0.4: JP3.5@205.05,47.46 205.24,47.65 208.65,47.65 v1(208.7,47.6)
  Bottom Layer w0.4: R5.2@208.65,38.15 208.65,47.55 v1(208.7,47.6)
NetJP5_2: JP5.2 X47.1 | length 60.6
  Top Layer w0.4: JP5.2@199.11,3.45 199.11,5.91 202.4,9.2 202.4,17.9 201.55,18.75 201.55,40.7 202.3,41.45 202.3,47.6 v1(202.05,47.85)
  Bottom Layer w0.4: X47.1@188.15,47.45 188.55,47.85 v1(202.05,47.85)
NetJP5_3: JP5.3 X31.1 | length 61.8
  Top Layer w0.5: v1(179.1,17.45) 195.95,17.45 v1(196.05,17.55)
  Bottom Layer w0.4: X31.1@178.15,47.45 178.15,45.55 178.95,44.75 178.95,17.6 v1(179.1,17.45) ; v1(196.05,17.55) 196.05,3.95 196.56,3.44 JP5.3@196.6,3.4
NetJP6_11: JP6.11 JP10.1 | length 28.8
  Top Layer w0.5: JP10.1@42.9,24.8 51.2,24.8 v1(51.35,24.65)
  Bottom Layer w0.5: v1(51.35,24.65) 51.4,24.65 51.25,24.5 51.25,8.1 53.3,6.05 JP6.11@53.3,5.3
NetJP7_1: JP7.1 JP7.2 U9.13 | length 46.9
  Top Layer w0.5: U9.13@133.365,104.225 133.365,105.815 134.55,107 156.2,107 161.1,102.1 167.7,102.1 170.7,105.1 JP7.1@174.9,105.1
NetJP7_3: JP7.3 JP7.4 U9.12 | length 44.5
  Top Layer w0.5: U9.12@134.635,104.225 134.635,105.385 135.5,106.25 155.6,106.25 160.7,101.15 168.75,101.15 170.16,102.56 JP7.3@174.9,102.56
NetJP8_5: JP8.5 U9.6 | length 126.9
  Top Layer w0.4: U9.6@135.95,95.05 135.95,93.55 138.45,91.05 v1(155.65,91.05) ; v1(153.95,57.45) 153.95,65.95 v1(157.2,69.2)
  Bottom Layer w0.5: JP8.5@151.92,5.4 151.92,12.97 154.65,15.7 164.6,15.7 166.45,17.55 166.45,44.95 v1(153.95,57.45) ; 155.6,80.15 155.6,91.05 v1(155.65,91.05) ; 155.65,80.15 157.2,78.6 v1(157.2,69.2)
NetJP8_6: JP8.6 U9.3 | length 135.6
  Top Layer w0.4: U9.3@132.1,94.9 132.1,93.6 131.3,92.8 131.3,89.75 131.5,89.55 v1(154.35,89.55) ; v1(153.7,55.55) 152.95,56.3 152.95,66.75 v1(155.8,69.6)
  Bottom Layer w0.5: JP8.6@151.92,2.86 150.65,4.13 150.65,7.3 151,7.65 151,13.65 153.95,16.6 164.2,16.6 165.45,17.85 165.45,44.55 154.45,55.55 v1(153.7,55.55) ; v1(154.35,89.55) 154.4,89.5 154.4,79.95 156.1,78.25 156.1,69.9 v1(155.8,69.6)
NetJP8_7: JP8.7 U9.5 | length 130.2
  Top Layer w0.4: U9.5@134.6,95 134.6,96.15 135.65,97.2 150.5,97.2 v1(152.95,94.75) ; v1(153.75,53.65) 152.2,55.2 152.2,67.8 155.05,70.65 v1(155.05,70.95)
  Bottom Layer w0.5: JP8.7@149.38,5.4 149.38,7.53 149.95,8.1 149.95,14.05 153.45,17.55 163.4,17.55 164.4,18.55 164.4,44.05 154.8,53.65 v1(153.75,53.65) ; v1(152.95,94.75) 152.95,88.8 153.45,88.3 153.45,79.55 155.25,77.75 155.25,71.15 v1(155.05,70.95)
NetJP8_8: JP8.8 U9.7 | length 125.9
  Top Layer w0.4: U9.7@137.175,94.975 137.175,93.925 138.8,92.3 151.25,92.3 v1(151.4,92.45) ; v1(153.7,51.75) 151.45,54 151.45,68.6 153.85,71 153.85,72.3 v1(154.1,72.55)
  Bottom Layer w0.5: JP8.8@149.38,2.86 148.1,4.14 148.1,7.8 148.9,8.6 148.9,14.45 153.05,18.6 162.65,18.6 163.3,19.25 163.3,43.4 154.95,51.75 v1(153.7,51.75) ; v1(151.4,92.45) 151.4,88.8 152.55,87.65 152.55,79.15 154.1,77.6 v1(154.1,72.55)
NetJP8_11: JP8.11 U13.5 | length 107.1
  Top Layer w0.4: v1(150,81.9) 150.25,81.65 160.85,81.65 161.045,81.455 161.075,81.425 161.1,81.4 U13.5@161.1,81.45 ; v1(151.65,75.35) 151.65,71.35 150.05,69.75 150.05,51.6 v1(153.85,47.8)
  Bottom Layer w0.5: JP8.11@144.3,5.4 144.3,6.95 146.9,9.55 146.9,15.3 152.05,20.45 160.7,20.45 161.3,21.05 161.3,42.25 155.75,47.8 v1(153.85,47.8) ; v1(150,81.9) 150,79.15 151.65,77.5 v1(151.65,75.35)
NetJP8_12: JP8.12 R24.1 | length 119.4
  Top Layer w0.4: v1(151.1,86.9) 151.75,86.25 163.05,86.25 R24.1@165.15,88.35 ; v1(152.95,73.9) 152.95,71.45 150.8,69.3 150.8,52.85 153.718,49.932 v1(153.75,49.9)
  Bottom Layer w0.5: JP8.12@144.3,2.86 145.55,4.11 145.55,6.85 147.95,9.25 147.95,15 152.5,19.55 161.65,19.55 162.3,20.2 162.3,42.9 155.3,49.9 v1(153.75,49.9) ; v1(151.1,86.9) 151.35,86.65 151.35,79.1 152.95,77.5 v1(152.95,73.9)
NetJP9_1: JP9.1 Q5.3 R23.2 | length 23.1
  Top Layer w0.4: R23.2@161.688,88.593 161.893,88.593 163.4,90.1 170.05,90.1 174.7,85.45 174.7,78.45 JP9.1@175.05,78.1
NetJP9_7: JP9.7 U13.2 | length 14.8
  Top Layer w0.5: U13.2@168.65,81.4 170.05,80 170.05,78.25 171.45,76.85 173.55,76.85 173.85,76.55 173.85,71.85 175.11,70.59 JP9.7@175.11,70.48
NetJP9_8: JP9.8 R25.1 | length 3.9
  Top Layer w0.5: R25.1@168.75,70.45 168.75,70.4 168.772,70.422 168.775,70.425 168.83,70.48 JP9.8@172.57,70.48
NetJP10_2: JP10.2 X25.1 | length 5.1
  Top Layer w0.5: JP10.2@42.9,22.26 43.59,22.26 45.35,20.5 X25.1@47.3,20.5
NetJP14_1: JP14.1 U17.3 | length 5.9
  Top Layer w0.4: JP14.1@66.9,80.4 69.3,78 v1(71.05,78)
  Bottom Layer w0.4: v1(71.05,78) U17.3@71.85,78
NetQ1_1: Q1.1 R34.2 R36.2 | length 6.8
  Bottom Layer w0.4: R34.2@79.1,109.1 81.4,109.1 R36.2@82.75,107.75 ; R36.2@82.35,107.85 82.95,107.25 82.95,105.5
NetQ2_1: Q2.1 R10.2 | length 13.2
  Top Layer w0.6: v1(13.25,102.6) 13.3,102.55 v1(19.15,102.55)
  Bottom Layer w0.5: v1(13.25,102.6) 13.5,102.85 13.5,107.85 Q2.1@13.65,108
  Bottom Layer w0.6: v1(19.15,102.55) 19.193,102.593 R10.2@20.812,102.593
NetQ2_3: Q2.3 U2.2 | length 5.8
  Bottom Layer w0.6: Q2.3@14.55,105.8 14.563,105.787 U2.2@14.563,100.031
NetQ3_1: Q3.1 R14.2 | length 6.2
  Bottom Layer w0.3: Q3.1@28.552,104.702 29.654,103.6 30.7,103.6 30.75,103.55 30.9,103.4 30.9,103.3
  Bottom Layer w0.5: 30.9,103.3 31.507,102.693 R14.2@33.812,102.693